# Altium PCB ATLAS_XP2V6.PcbDoc (part 4 of 4)
Units mil, origin at the board's own origin, x right, y up, seen from the top; angles counter-clockwise.
Board outline 6380 x 9190 mil, 4 copper layers (Primary Component Side, Ground Plane, Power Plane, Secondary Component Side), stack 35.4 mil thick; 203 components, 228 nets, 1212 pads, 912 vias.
Unrouted connection lines stored in the file: 522.
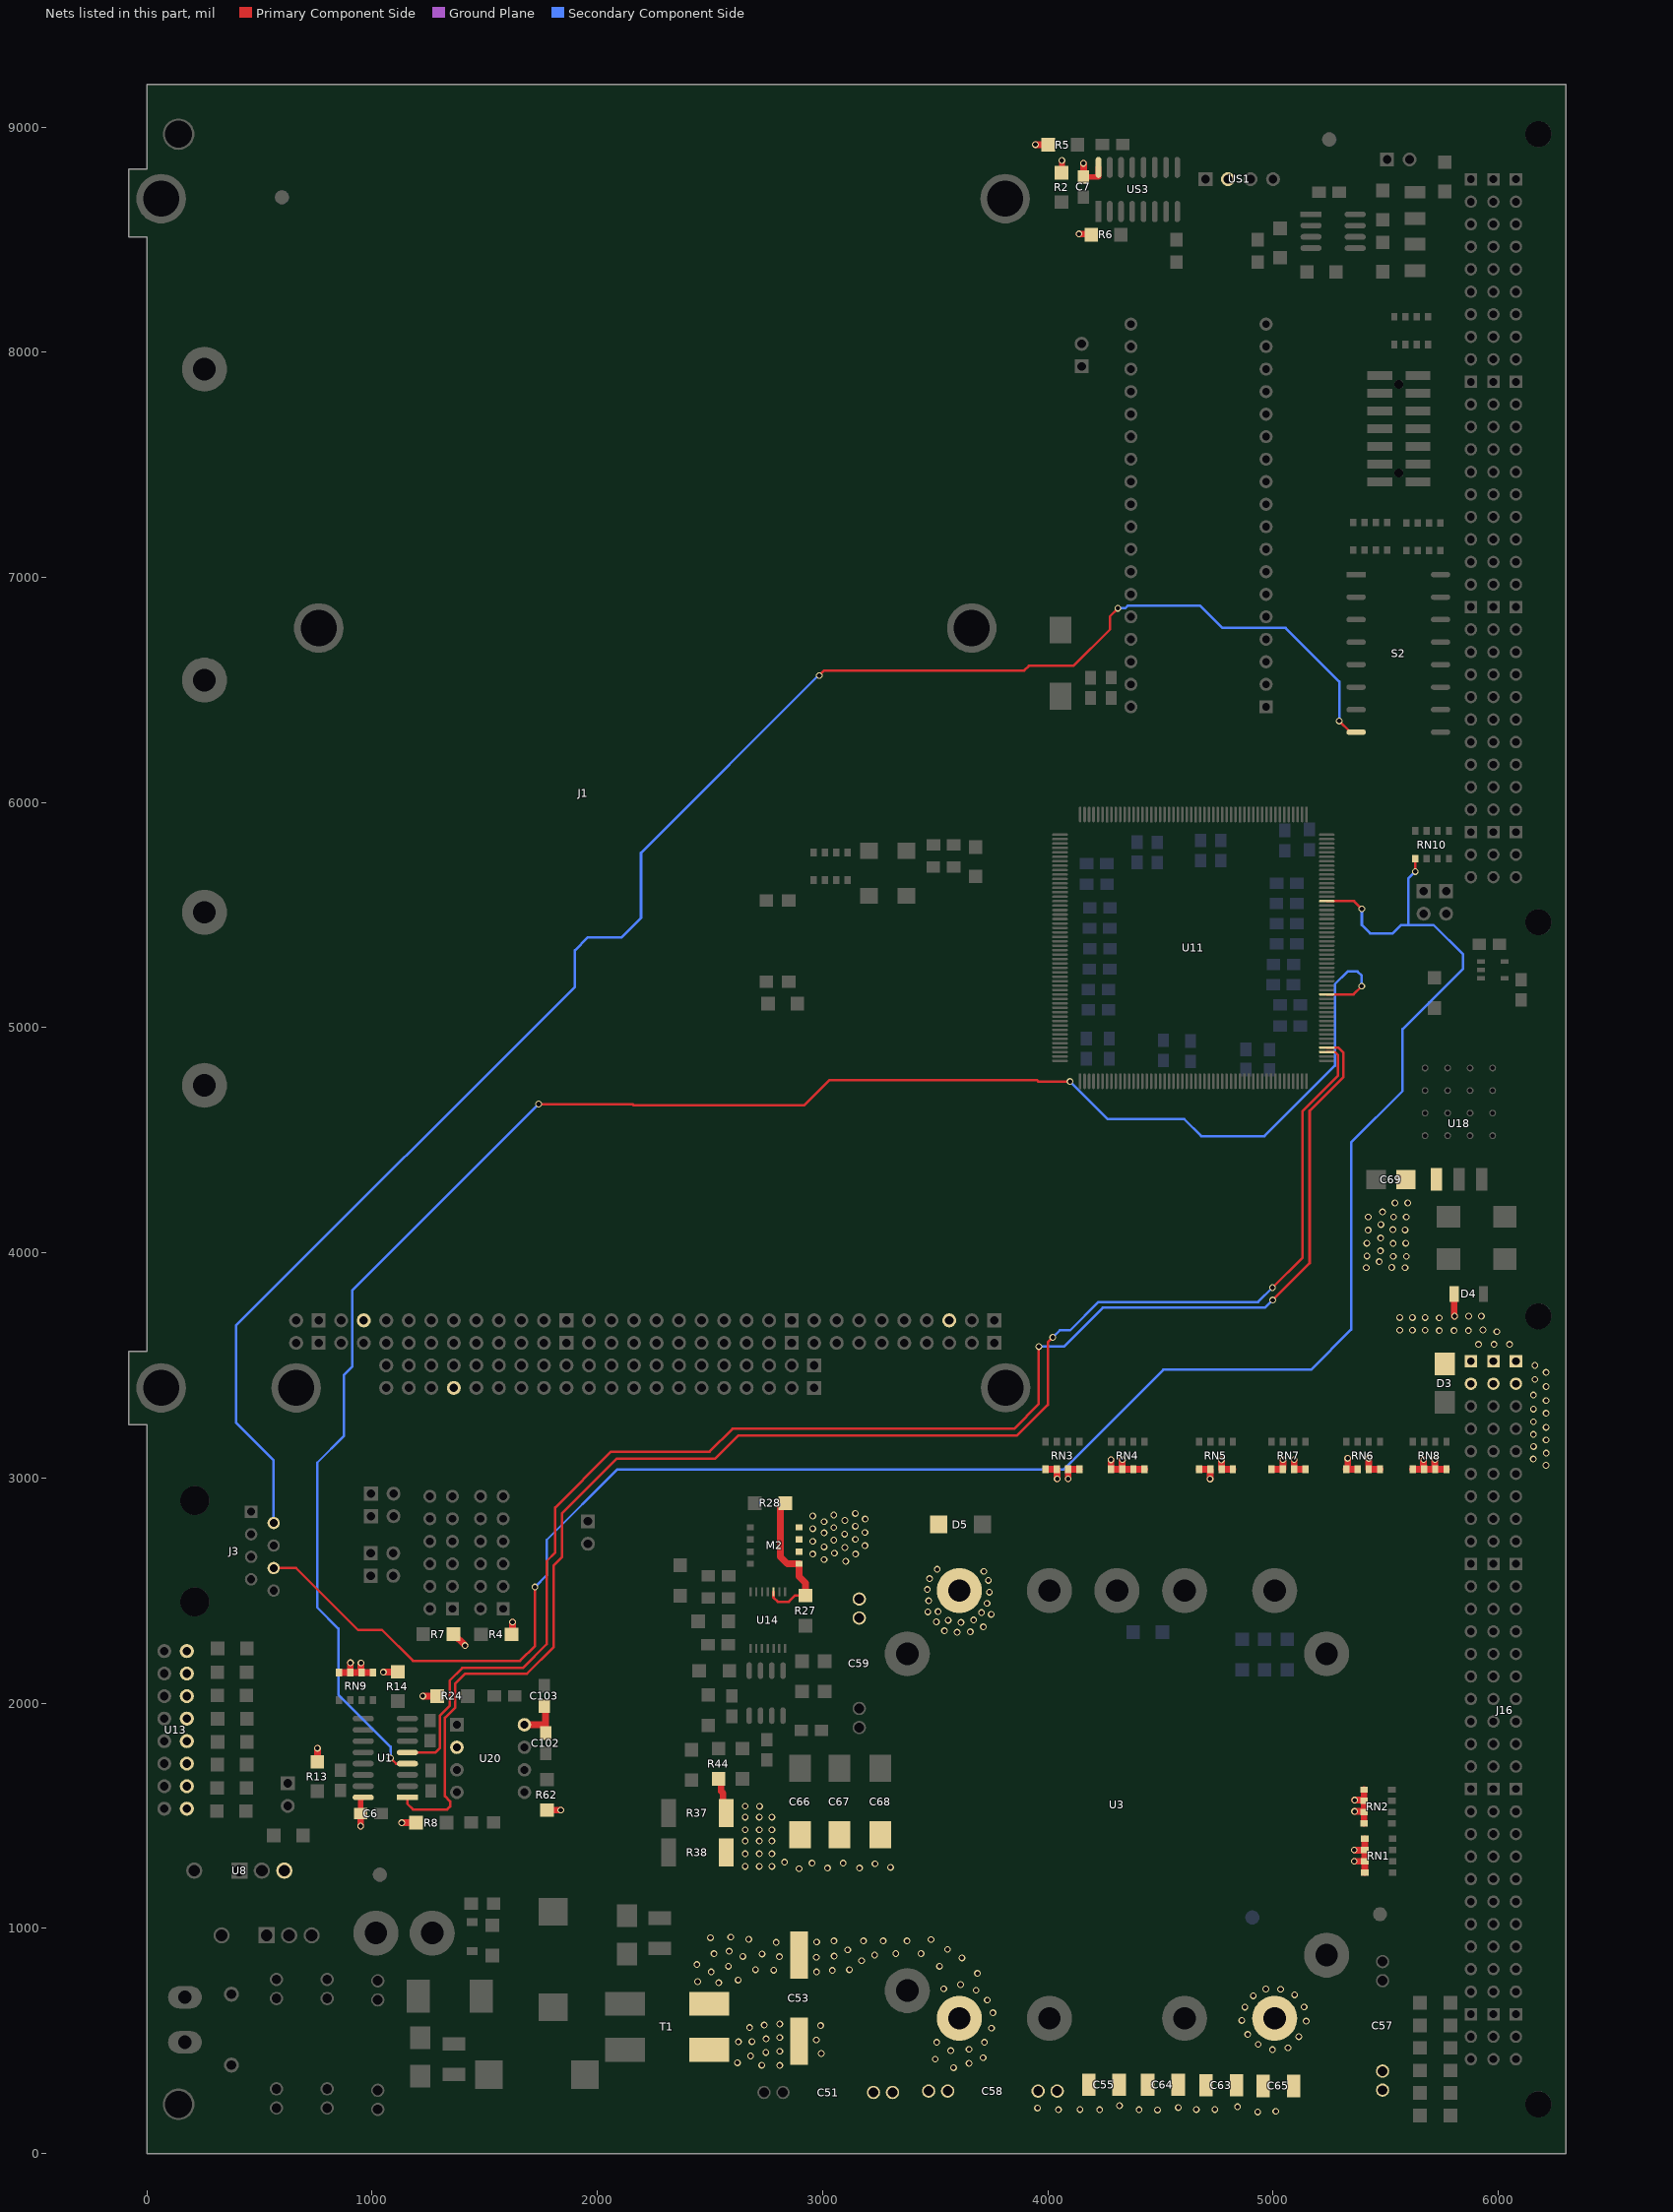
[diagram p6: the nets of this part, all layers, seen from the top]

## Via types
v1: diameter 30, hole 20, Primary Component Side to Secondary Component Side, 910 vias
v2: diameter 50, hole 28, Primary Component Side to Secondary Component Side, 2 vias

## Nets (pads, with @x,y where several pads share a name; then routed paths per layer and width w, separated by ;. In a path a pad name is that pad's centre, name@x,y a point inside that pad or via, vN(x,y) a via of type N, cw(c..) or ccw(c..) an arc to the next point about the centre after c; other vN are vias at no path point) (continued)
VCC_+5V: C6.1 C7.1 C69.1 C102.1 C103.1 D3.2 D4.2 J1.B3 J1.B29 J1.D16 J16.A1 J16.A2 J16.B1 J16.B2 J16.C1 J16.C2 M2.5 M2.6 M2.7 M2.8 R2.1 R4.1 R5.1 R6.1 R7.1 R8.1 R13.1 R14.1 R24.2 R27.1 R28.1 R62.2 RN1.1 RN1.2 RN1.3 RN1.4 RN2.1 RN2.2 RN2.3 RN2.4 RN3.1 RN3.2 RN3.3 RN3.4 RN4.1 RN4.2 RN4.3 RN4.4 RN5.1 RN5.2 RN5.3 RN5.4 RN6.1 RN6.2 RN6.3 RN6.4 RN7.1 RN7.2 RN7.3 RN7.4 RN8.1 RN8.2 RN8.3 RN8.4 RN9.1 RN9.2 RN9.3 RN9.4 U1.16 U8.3 U13.1 U13.2 U13.3 U13.4 U13.5 U13.6 U13.7 U13.8 U14.10 U18.1 U20.2 U20.8 US1.2 US3.16 | length 3908.6
  Primary Component Side w12: U1.16@949.17,1581.25 U1.16@951.99,1581.25 ; v1@950,2178.51 v1(950.08,2178.59) ; R4.1@1618.73,2304.98 R4.1@1623.16,2304.98 ; U14.10@2782.08,2494.27 2782.08,2468.75 2800.83,2450 2850,2450 2878.27,2478.27 R27.1@2924.02,2478.27 ; v1@4279.91,3080.71 v1(4280.53,3080.71) ; v1@4329.91,3081.25 v1(4331.25,3081.25)
  Primary Component Side w25: C6.1@949.17,1509 U1.16@949.17,1581.25 ; U1.16@951.99,1581.25 U1.16@960.25,1581.25 ; R2.1@4061.04,8796.73 4062.5,8796.73 v1(4062.46,8851.88) ; v1@4138.4,8525 v1(4138.4,8525.24) ; C7.1@4158.61,8779 4225,8779 US3.16@4225,8821 ; R6.1@4193.56,8521.91 R6.1@4193.56,8525
  Primary Component Side w29.53: v1@4279.91,3080.71 RN4.1@4279.91,3038.4 RN4.2@4329.91,3038.4 ; v1@4329.91,3081.25 RN4.2@4329.91,3038.4 ; RN4.3@4379.91,3038.4 RN4.2@4329.91,3038.4
  Primary Component Side w30: R13.1@756.68,1738.9 757,1738.9 v1(757,1800) ; RN9.4@853.08,2136.48 RN9.3@903.08,2136.48 ; v1(903.37,2179.18) 903.08,2178.89 RN9.3@903.08,2136.48 ; v1(949,1454) 949,1509 C6.1@949.17,1509 ; v1@950,2178.51 950,2136.56 RN9.2@949.92,2136.48 ; RN9.1@1003.08,2136.48 RN9.2@953.08,2136.48 RN9.2@949.92,2136.48 ; v1(1050,2137.5) 1113.71,2137.5 R14.1@1113.71,2139.48 ; v1(1131.25,1468.75) R8.1@1195,1468.75 ; v1(1225,2031.25) R24.2@1288.75,2031.25 ; R7.1@1361.25,2306.25 1361.8,2306.25 v1@1412.37,2255.68 ; R4.1@1623.16,2304.98 v1(1623.16,2360) ; U20.8@1675.98,1903.97 1768.47,1903.97 1768.99,1903.45 1768.99,1880.44 C102.1@1769.99,1879.44 ; C103.1@1764.13,1986.65 1769.99,1986.65 C102.1@1769.99,1879.44 ; C102.1@1769.99,1867.05 C102.1@1769.99,1879.44 ; R62.2@1775.84,1525.04 v1(1837.5,1525) ; R28.1@2834.15,2888.41 2813,2867.27 2813,2650 2843.91,2619.09 M2.5@2894.96,2619.09 ; R27.1@2924.02,2478.27 2924.02,2533.27 2894.96,2562.32 M2.5@2894.96,2619.09 ; v1(3945,8922) 4001.38,8922 R5.1@4001.38,8921.28 ; RN3.1@3990.2,3038.4 RN3.2@4040.2,3038.4 4041.73,3038.4 v1(4041.73,2996.28) ; v1(4090.02,2996.29) 4090.2,2996.29 RN3.3@4090.2,3038.4 RN3.4@4140.2,3038.4 ; v1@4138.4,8525 R6.1@4193.56,8525 ; v1(4158,8839) 4158.61,8839 C7.1@4158.61,8779 ; RN4.3@4379.91,3038.4 RN4.4@4429.91,3038.4 ; RN5.1@4671.5,3038.4 RN5.2@4720.4,3038.4 ; v1(4720.4,2995.41) RN5.2@4720.4,3038.4 ; v1(4770.86,3080.43) 4770.86,3081.25 4771.5,3081.25 RN5.3@4771.5,3038.4 RN5.4@4821.5,3038.4 ; RN7.1@4993.76,3038.4 RN7.2@5043.76,3038.4 v1(5043.75,3081.25) ; v1(5093.75,3081.25) RN7.3@5093.76,3038.4 RN7.4@5143.76,3038.4 ; RN6.1@5325.05,3038.4 RN6.1@5332.15,3038.4 ; v1(5331.25,3087.5) 5332.15,3087.5 RN6.1@5332.15,3038.4 ; v1(5360.44,1347.95) 5362.5,1347.95 5362.5,1347.41 RN1.2@5407.79,1347.4 ; v1(5360.65,1297.48) 5362.5,1297.48 5362.5,1297.41 RN1.3@5407.79,1297.4 ; v1(5362.18,1518.67) 5361.54,1519.31 RN2.3@5404.38,1519.31 ; v1(5362.34,1569.14) 5362.2,1569.28 RN2.2@5404.38,1569.28 ; RN6.2@5375.05,3038.4 RN6.1@5332.15,3038.4 ; RN2.4@5404.38,1465.82 RN2.3@5404.38,1515.82 RN2.3@5404.38,1519.31 ; RN2.1@5404.38,1615.82 RN2.2@5404.38,1569.28 ; RN1.4@5407.79,1247.4 RN1.3@5407.79,1297.4 ; RN1.1@5407.79,1397.4 RN1.2@5407.79,1347.4 ; v1(5425,3087.5) 5425.05,3087.5 RN6.3@5425.05,3038.4 RN6.4@5475.05,3038.4 ; RN8.1@5620.15,3038.4 RN8.2@5668.16,3038.4 ; v1(5668.75,3081.25) 5668.16,3081.25 RN8.2@5668.16,3038.4 ; v1(5718.75,3081.25) 5718.39,3081.25 RN8.3@5718.39,3038.4 ; RN8.4@5770.15,3038.4 RN8.3@5720.15,3038.4 RN8.3@5718.39,3038.4 ; D4.2@5804,3818 5804,3718.75 v1(5806.25,3718.75) ; RN9.3@903.08,2136.48 RN9.2@949.92,2136.48 ; v1@1412.37,2255.68 1412.5,2255.68 1412.5,2255.55 v1@1412.37,2255.68 ; M2.5@2894.96,2619.09 M2.5@2895.87,2619.09 2894.96,2620 M2.5@2894.96,2619.09 ; RN5.2@4720.4,3038.4 4720.4,3039.5 RN5.2@4721.5,3038.4 RN5.2@4720.4,3038.4 ; RN2.3@5404.38,1519.31 RN2.2@5404.38,1565.82 RN2.2@5404.38,1569.28 ; RN1.3@5407.79,1297.4 RN1.2@5407.79,1347.4 ; RN8.2@5668.16,3038.4 RN8.2@5670.15,3038.4 RN8.3@5718.39,3038.4
  Ground Plane w50: J16.C1@5878.25,3518.75 J16.C1@5878.5,3518.5
  other v1: 1412.33,2255.68 3102.68,2630.07 3006.25,2637.5 2956.25,2662.5 3146.68,2662.14 3052.71,2665.87 3098.95,2691.23 3006.25,2693.75 3187.7,2699.43 2956.25,2718.75 3049.72,2724.04 3145.19,2727.03 3097.45,2750.89 3006.25,2756.25 3187.7,2757.61 2956.25,2775 3049.72,2779.98 3145.19,2785.95 3006.25,2806.25 3098.95,2811.31 3189.19,2817.27 2956.25,2831.25 3049.34,2835.39 3145.19,2842.63 6211.93,3056.44 6155.45,3084.53 6212.82,3110.56 6156.93,3140.13 6212.5,3168.75 6156.25,3193.75 6212.5,3225 6156.25,3250 6212.5,3287.5 6156.25,3306.25 6212.5,3343.75 6156.25,3368.75 6212.5,3406.25 6162.5,3437.5 6212.5,3468.75 6162.5,3500 5912.5,3593.75 5981.25,3593.75 6050,3593.75 5993.75,3650 5738.19,3654.73 5803.42,3654.73 5867.68,3654.73 5562.5,3656.25 5618.75,3656.25 5675,3656.25 5932.03,3657.36 5738.19,3710.84 5562.5,3712.5 5618.75,3712.5 5675,3712.5 5868.75,3718.75 5925,3718.75 5414,3934 5527,3935 5586,3934 5471,3961 5533.52,3984.19 5591.86,3984.19 5417.32,3985.63 5477,4009 5533.04,4041.56 5589.45,4042.53 5416.79,4043.01 5478,4066 5422,4101 5532,4103 5586,4102 5479,4126 5422.75,4159 5535.25,4159 5591.5,4159 5486,4182 5541.5,4221.5 5597.75,4221.5
VCCVICOR: C59.3 C59.4 C66.1 C67.1 C68.1 D5.1 R37.2 R38.2 R44.2 U3.5 | length 179.6
  Primary Component Side w29.53: R44.2@2537.5,1663.75 2548.83,1663.75 2548.83,1608.99 2558.06,1599.76 2558.06,1512.5 R37.2@2571.25,1512.5
  other v1: 2895.52,1264.94 3021.99,1267.28 3163.67,1267.28 3301.84,1270.79 2656.25,1275 2718.75,1275 2775,1275 3232.86,1286.61 2952.83,1289.5 3091.4,1289.5 2831.25,1293.75 2656.25,1331.25 2718.75,1331.25 2775,1331.25 2656.25,1387.5 2718.75,1387.5 2775,1387.5 2656.25,1437.5 2718.75,1437.5 2775,1437.5 2656.25,1493.75 2718.75,1493.75 2775,1493.75 2720.4,1541.91 2656.08,1542.33 3597.12,2314.64 3656.04,2316.88 3541.18,2321.36 3713.47,2338.51 3614.27,2358.65 3505.12,2361.09 3557.59,2368.34 3670.21,2369.09 3748.76,2394.19 3705.55,2402.46 3467.42,2405.22 3512.5,2406.25 3730.37,2442.92 3471.07,2454.86 3740.49,2492.57 3465.11,2504.83 3735.89,2544.97 3474.8,2553.31 3715.66,2585.43 3508.8,2594.62
VICOR_+IN: C51.1 C51.2 C53.1 C55.1 C58.1 C58.2 C63.1 C64.1 C65.1 T1.2 U3.1
  other v1: 3581.25,381.25 3650,400 3500,418.75 3712.5,425 3568.75,456.25 3650,462.5 3506.25,493.75 3718.75,493.75 3750,556.25 3756.25,625 3731.25,681.25 3681.25,725 3537.5,731.25 3612.5,750 2539,758 2445,763 2625,770 3687.5,800 2505,806 2973,806 3043,813 2783,814 2702,816 3119,816 2582,831 3518.75,831.25 2442,839 3173,856 3618.75,868.75 2972,871 2646,875 2808,874 3051,876 3231,881 2518,887 2731,886 3325,887.5 3437.5,887.5 2585,898 3111.31,904.17 3554.69,906.03 2793.75,937.5 2974,939 3050,943.75 3181.25,943.75 3268.75,943.75 3375,943.75 2672,951 3481.25,950 2502,958 2592,960.75
VICOR_-IN: C53.2 C55.2 C57.1 C57.2 C58.3 C58.4 C63.2 C64.2 C65.2 T1.3 U3.4
  other v1: 4932,184 5012,187 4487,193 4047,194 4143,195 4230,194 4405,194 4659,195 4742,195 3954,202 4579,204 4842,207 4318,212 2810,391 2730,392 2622,403 2680,433 2994,444 2748,449 2810,454 4997.31,461.02 5066.4,469.22 4934.08,484.44 2626,496 2686,497 2972,504 2749,509 2810,515 5114.41,518.4 4887.24,528.93 2676,559 2991,568 2741,570 2810,575 5147.19,587.48 4861.48,590.99 4875,650 5137.83,650.71 4912.5,700 5095.67,704.58 5033.61,729.17 4968.04,730.34
WDT_OUT_STARI: U1.5 U11.56 | length 6619
  Primary Component Side w11: U1.5@1156.25,1781.25 1281.25,1781.25 1300,1800 1300,1943.75 1343.75,1987.5 1343.75,2100 1400,2156.25 1668.75,2156.25 1775,2262.5 1775,2631.25 1812.5,2668.75 1812.5,2868.75 2060.75,3117 2498.25,3117 2600,3218.75 3850,3218.75 3960.04,3328.79 v1(3960.04,3583.86) ; v1(4998.49,3790.23) 5162.5,3954.24 5162.5,4631.25 5312.5,4781.25 5312.5,4887.5 5288.4,4911.6 U11.56@5238.45,4911.6
  Secondary Component Side w11: v1(3960.04,3583.86) 3960.04,3583.45 4070.95,3583.45 4243.75,3756.25 4964.51,3756.25 v1(4998.49,3790.23)
WDT_SIG_STARI: U1.4 U11.68 | length 8078.9
  Primary Component Side w11: v1(1081.25,1756.25) 1106.25,1731.25 U1.4@1156.25,1731.25 ; v1(1739,4661) 1739,4659.47 2157,4659.47 2160.22,4656.25 2918.75,4656.25 3030.5,4768 3950.75,4768 3957.47,4761.28 v1(4098.51,4761.28) ; U11.68@5238.45,5148 5357.54,5148 5393.92,5184.38 v1(5393.74,5184.55)
  Secondary Component Side w11: v1(1081.25,1756.25) 1081.25,1806.25 850,2037.5 850,2331.25 756.25,2425 756.25,3068.33 875.42,3187.5 875.42,3458.42 912,3495 912,3834 v1(1739,4661) ; v1(4098.51,4761.28) 4266.04,4593.75 4606.25,4593.75 4681.25,4518.75 4962.25,4518.75 5274.75,4831.25 5274.75,5151.05 5275.25,5151.55 5275.25,5193.75 5331.25,5249.75 5375.25,5249.75 5393.74,5231.26 v1(5393.74,5184.55)
WDT_TRG: U1.1 U11.55 | length 6862.4
  Primary Component Side w10.9: U1.1@1156.25,1581.25 1156.25,1552.75 1181,1528 1333,1528 1346,1541 1346,1563.42 1323,1586.42 1323,1935.5 1368.75,1981.25 1368.75,2087.5 1412.5,2131.25 1687.5,2131.25 1806.25,2250 1806.25,2612.5 1843.75,2650 1843.75,2843.75 2085,3085 2522.5,3085 2625,3187.5 3862.5,3187.5 4000,3325 4000,3602.47 v1(4022.1,3624.56) ; v1(4997.45,3845.6) 5131.25,3979.4 5131.25,4629.88 5287.5,4786.13 5287.5,4879.52 5275.12,4891.9 U11.55@5238.45,4891.9
  Secondary Component Side w10.9: v1(4022.1,3624.56) 4053.78,3656.25 4100,3656.25 4225,3781.25 4933.1,3781.25 v1(4997.45,3845.6)
XP_PRESENT_IN: J3.6 RN10.5 U11.89 | length 8766.1
  Primary Component Side w11: J3.6@562.5,2600 662.5,2600 937.5,2325 1043.75,2325 1181.25,2187.5 1656.25,2187.5 1722.87,2254.12 v1(1722.87,2516.01) ; U11.89@5238.45,5561.7 5360,5561.7 v1(5394.23,5527.46) ; RN10.5@5631.05,5751.1 5631.25,5751 v1(5631.25,5693.25)
  Secondary Component Side w11: v1(1722.87,2516.01) 1775,2568.15 1775,2725 2087.5,3037.5 4068.75,3037.5 4512.5,3481.25 5168.75,3481.25 5347,3659.5 5347,4490.75 5575,4718.75 5575,4993.75 5843.75,5262.5 5843.75,5325 5712.5,5456.25 5600,5456.25 ; v1(5394.23,5527.46) 5394.23,5455.77 5431.25,5418.75 5531.25,5418.75 5568.75,5456.25 5600,5456.25 ; v1(5631.25,5693.25) 5600,5662.5 5600,5456.25
XP_PRESENT_OUT: J3.2 S2.8 | length 7878.5
  Primary Component Side w11: v1(2985,6564) 3007,6586 3895,6586 3916,6607 4114,6607 4276,6769 4276,6827.26 v1(4311.29,6862.55) ; v1(5293.75,6362.5) 5343.75,6312.5 S2.8@5368.75,6312.5
  Primary Component Side w12: v1@4311.29,6862.5 v1(4311.29,6862.55)
  Secondary Component Side w11: J3.2@562.5,2800 562.5,3079 395,3246.5 395,3676.25 1900,5181.25 1900,5343.75 1956.25,5400 2106.25,5400 2193.75,5487.5 2193.75,5776.5 2981.25,6564 v1(2985,6564) ; v1(4311.29,6862.55) 4343.75,6862.55 4356.2,6875 4675,6875 4775,6775 5056.17,6775 5293.75,6537.42 v1(5293.75,6362.5)
pads on no net: J1.A1 J1.A10 J1.B5 J1.B6 J1.B7 J1.B8 J1.B9 J1.B15 J1.B16 J1.B17 J1.B18 J1.B19 J1.B20 J1.B21 J1.B22 J1.B23 J1.B24 J1.B25 J1.B26 J1.B27 J1.B30 J1.C6 J1.C7 J1.C8 J1.C9 J1.C10 J1.D1 J1.D8 J1.D9 J1.D10 J1.D11 J1.D12 J1.D13 J1.D14 J1.D15 J1.D17 J3.MTH1 J3.MTH2 J14.12 J14.14 J14.15 J14.16 J16.A16 J16.A17 J16.A18 J16.A19 J16.A21 J16.A23 J16.A27 J16.A29 J16.HOLE1 J16.HOLE2 J17.A4 J17.A5 J17.A6 J17.A7 J17.A8 J17.A9 J17.A10 J17.A11 J17.A12 J17.A13 J17.A14 J17.A15 J17.A16 J17.A17 J17.A18 J17.A19 J17.A20 J17.A21 J17.A22 J17.A23 J17.A24 J17.A25 J17.A26 J17.A27 J17.A28 J17.A29 J17.A30 J17.A31 J17.A32 J17.B4 J17.B5 J17.B6 J17.B7 J17.B8 J17.B9 J17.B10 J17.B11 J17.B12 J17.B13 J17.B14 J17.B15 J17.B16 J17.B17 J17.B18 J17.B19 J17.B20 J17.B21 J17.B22 J17.B23 J17.B24 J17.B25 J17.B26 J17.B27 J17.B28 J17.B29 J17.B30 J17.B31 J17.B32 J17.C4 J17.C5 J17.C6 J17.C7 J17.C8 J17.C9 J17.C10 J17.C11 J17.C12 J17.C13 J17.C14 J17.C15 J17.C16 J17.C17 J17.C18 J17.C19 J17.C20 J17.C21 J17.C22 J17.C23 J17.C24 J17.C25 J17.C26 J17.C27 J17.C28 J17.C29 J17.C30 J17.C31 J17.C32 J17.HOLE1 J17.HOLE2 RN1.5 RN9.8 RN10.6 RN13.8 RN14.8 S2.7 U1.12 U3.2 U3.3 U8.2 U9.2 U11.1 U11.2 U11.24 U11.27 U11.51 U11.52 U11.53 U11.54 U11.103 U11.104 U11.105 U11.106 U11.135 U11.146 U11.155 U11.156 U11.157 U11.158 U11.167 U11.171 U11.172 U11.175 U11.207 U11.208 U14.3 U15.1 U15.34 U20.5 UR5.1 UR6.1 UR7.1 UR8.1 UR9.1 UR10.1 UR11.1 UR12.1 US3.4 US3.5 US3.6 US3.7 US3.9 US3.10 US3.11 US3.12
copper on no net: | length 999.4
  Ground Plane w2: 410.51,393 ccw(c375,393) 410.51,393 ; 5361.56,2219 ccw(c5238,2219) 5361.56,2219

## Polygon pours and split planes (outlines as drawn)
$$$25132 on Primary Component Side (solid, remove dead copper, pour order 84): 2550,2225 2687.5,2225 2687.5,2268.75 2631.25,2325 2631.25,2393.75 2550,2393.75
GND_PE11 on Primary Component Side (solid, remove dead copper, pour order 82): 3087.5,1875 3118.75,1843.75 3200,1843.75 3250,1893.75 3250,1956.25 3400,2106.25 3418.75,2106.25 3481.25,2168.75 3481.25,2262.5 3418.75,2325 3337.5,2325 3206.25,2193.75 3206.25,2093.75 3087.5,1975
VICOR_-IN on Primary Component Side (solid, remove dead copper, pour order 80): 34 vertices, not listed, extent 3894,154.5 5133,373.25
+24VDC_DIODE on Primary Component Side (solid, remove dead copper, pour order 78): 19 vertices, not listed, extent 1312.5,456.25 1868,768.75
GND on Primary Component Side (solid, remove dead copper, pour order 76): 3175,5625 3175,5566 3162.5,5553.5 3162.5,5500 3187.5,5475 3262.5,5475 3281.25,5493.75 3281.25,5625
GND on Primary Component Side (solid, remove dead copper, pour order 68): 4833.68,2500 ccw(c5007,2500) 5007,2326.68 ccw(c5007,2500) 5180.32,2500 ccw(c5007,2500) 5007,2673.32 ccw(c5007,2500)
+24VDC on Primary Component Side (solid, remove dead copper, pour order 64): 23 vertices, not listed, extent 6.25,162.5 1131.25,1119
GND on Primary Component Side (solid, remove dead copper, pour order 56): 5757,700 5793.75,700 5817.38,676.38 5817.38,573 5834,556.25 6106.25,556.25 6125,537.5 6125,343.75 5881.25,100 5795,100 5757,138
GND on Primary Component Side (solid, remove dead copper, pour order 54): 19 vertices, not listed, extent 5636,3869 5885,4393.62
VCCVICOR on Primary Component Side (solid, remove dead copper, pour order 52): 31 vertices, not listed, extent 2537.5,1225 3825,2837.5
VICOR_-IN on Primary Component Side (solid, remove dead copper, pour order 48): 2401,507 2410,516 2586,516 2674,604 3000,604 3026,578 3026,430.51 2955.61,361 2448,361 2401,408
GND on Primary Component Side (solid, remove dead copper, pour order 44): 3957,6859 3990,6892 4147,6892 4171.5,6867.5 4171.5,6716 4156.25,6700.75 3993,6700.75 3960.38,6733.38 3960.38,6859
VCC_3V3 on Primary Component Side (solid, remove dead copper, pour order 42): 19 vertices, not listed, extent 5900,3778.5 6220,4383.5
VCC_3V3 on Primary Component Side (solid, remove dead copper, pour order 40): 3343.75,5874 3363.75,5894 3492.5,5894 3512.5,5874 3512.5,5641 3492.5,5621 3467,5621 3453,5635 3452.88,5637 3452.88,5722.88 3432,5743.75 3363.75,5743.75 3343.75,5763.75
VICOR_+IN on Primary Component Side (solid, remove dead copper, pour order 38): 64 vertices, not listed, extent 2407,151.5 4985,993.75
GND_24V_CMCHK on Primary Component Side (solid, remove dead copper, pour order 36): 1875,406.25 1893.75,425 1982,513 2193,513 2210.5,495.5 2210.5,380 2210.25,377.75 2193.75,361.25 2193.75,162.5 2182.25,151 1911.5,151 1875,187.5
VCC_+5V on Primary Component Side (solid, remove dead copper, pour order 34): 17 vertices, not listed, extent 5531.25,3031.25 6243.75,3762.5
VCC_5V_TPS_IN on Primary Component Side (solid, remove dead copper, pour order 32): 22 vertices, not listed, extent 1975,1275 2693.75,2862.5
VCC_+5V on Primary Component Side (solid, remove dead copper, pour order 22): 2776.25,2843.75 2756.25,2823.75 2756.25,2626.25 2776.25,2606.25 3162.5,2606.25 3287.5,2731.25 3287.5,2843.75 3256.25,2875 2943,2875 2931.25,2863.25 2931.25,2853.75 2921.25,2843.75
GND on Primary Component Side (solid, remove dead copper, pour order 20): 21 vertices, not listed, extent -64.12,8511 379.88,9162.94
GND on Primary Component Side (solid, remove dead copper, pour order 18): 2612.5,1673.75 2632.5,1693.75 2681.25,1693.75 2743.75,1756.25 2806.25,1756.25 2875,1825 3325,1825 3368.75,1781.25 3368.75,1700 3318.75,1650 2850,1650 2825,1625 2632.5,1625 2612.5,1645
GND_PE on Primary Component Side (solid, remove dead copper, pour order 10): 93 vertices, not listed, extent 12.5,12.5 5683,2337.5
+24VDC_CMCHK on Primary Component Side (solid, remove dead copper, pour order 8): 20 vertices, not listed, extent 1762.5,610 2326,1125
VCC_+5V on Primary Component Side (solid, remove dead copper, pour order 6): 21 vertices, not listed, extent 5383,3902.5 5750,4387.5
GND on Primary Component Side (solid, remove dead copper, pour order 4): 5381,4239 5396.5,4223.5 5472,4223.5 5503,4254.5 5503,4391.5 5517,4405.5 5517,4495.5 5496,4516.5 5420,4516.5 5381,4477.5
GND_24VDC on Primary Component Side (solid, remove dead copper, pour order 2): 1137.5,181.25 1156.25,162.5 1556.25,162.5 1575,181.25 1575,412.5 1425,412.5 1406.25,393.75 1162.5,393.75 1137.5,368.75
+24VDC_SW on Primary Component Side (solid, remove dead copper, pour order 0): 20 vertices, not listed, extent 1156.25,462.5 1467,1118
VICOR_+IN on Ground Plane (solid, remove dead copper, pour order 46): 30 vertices, not listed, extent 2407,147.69 3814,993.75
+24VDC_DIODE on Ground Plane (solid, remove dead copper, pour order 30): 19 vertices, not listed, extent 1312.5,456.25 1870,768.75
+24VDC on Ground Plane (solid, remove dead copper, pour order 28): 23 vertices, not listed, extent 6.25,162.5 1131.25,1118
+24VDC_CMCHK on Ground Plane (solid, remove dead copper, pour order 26): 17 vertices, not listed, extent 1868.75,662.5 2193.75,1125
+24VDC_SW on Ground Plane (solid, remove dead copper, pour order 14): 1156.25,1092.25 1156.25,576.25 1176.25,556.25 1236.25,556.25 1256.25,576.25 1256.25,770.25 1367.25,881.25 1412.5,881.25 1418.75,887.5 1418.75,956.25 1393.75,981.25 1393.75,1075 1350.75,1118 1182,1118
GND on Ground Plane (solid, remove dead copper, pour order 12): 59 vertices, not listed, extent -62.5,362.5 6281.25,9162.5
VCCVICOR on Secondary Component Side (solid, remove dead copper, pour order 74): 3431.25,2598.75 3451.25,2618.75 3786.25,2618.75 3806.25,2598.75 3806.25,2270 3786.25,2250 3550,2250 3431.25,2368.75
GND_24V_CMCHK on Secondary Component Side (solid, remove dead copper, pour order 72): 31 vertices, not listed, extent 1875,152.5 2327,1125
VICOR_-IN on Secondary Component Side (solid, remove dead copper, pour order 70): 32 vertices, not listed, extent 2403,151.12 5546,993.75
GND on Secondary Component Side (solid, remove dead copper, pour order 66): 55 vertices, not listed, extent 4812.5,2257.75 5176.77,2675.11
GND on Secondary Component Side (solid, remove dead copper, pour order 62): 48 vertices, not listed, extent 2387.5,325 6131.25,2618.75
GND on Secondary Component Side (solid, remove dead copper, pour order 60): 21 vertices, not listed, extent -63.12,8512 380.88,9163.94
GND_PE on Secondary Component Side (solid, remove dead copper, pour order 58): 56 vertices, not listed, extent 4813,1988.5 5339.55,2322.01
GND_24VDC on Secondary Component Side (solid, remove dead copper, pour order 50): 39 vertices, not listed, extent 6.25,162.5 1867,1137.5
GND_PE on Secondary Component Side (solid, remove dead copper, pour order 24): 29 vertices, not listed, extent 12,15.09 5342.83,341
VCC_+5V on Secondary Component Side (solid, remove dead copper, pour order 16): 89 vertices, not listed, extent 2931.25,2606.25 6256.25,3762.5
VCC_3V3 on Power Plane (split plane): 46 vertices, not listed, extent 2869.83,3886.08 6230.17,8248.92
VCC_5V_TPS_IN on Power Plane (split plane): 35 vertices, not listed, extent 1969.83,1276.08 2949.92,2867.67
VICOR_-IN on Power Plane (split plane): 47 vertices, not listed, extent 2403.08,151.07 5546.92,992.67
VCCVICOR on Power Plane (split plane): 31 vertices, not listed, extent 2538.58,1226.08 3823.92,2617.67
VCC_+5V on Power Plane (split plane): 218 vertices, not listed, extent 32.33,1057.33 6248.92,9148.92
GND_24VDC on Power Plane (split plane): 45 vertices, not listed, extent 337.69,670.69 412.31,744.3
no net on Power Plane (split plane): 53 vertices, not listed, extent 1876.08,152.58 2209.66,1123.92
GND_24VDC on Power Plane (split plane): 63 vertices, not listed, extent 7.33,163.58 1865.92,1136.42

## Keep-outs
Keep-Out Layer:
  the board outline again, w10

## Other copper
Primary Component Side:
  region net GND: 3656.25,2856.25 3656.25,2737.5 3693.75,2700 3787.5,2700 3818.75,2731.25 3818.75,2850 3800,2868.75 3668.75,2868.75 3656.25,2856.25
  region net GND: 2775,2225 2775,2350 2793.75,2368.75 2856.25,2368.75 2868.75,2356.25 2868.75,2281.25 2843.75,2256.25 2843.75,2225 2775,2225
  text "ATLAS_XP2" at 900,8837.5 h110
  text "v1.2" at 1981.25,8831.25 h42.5
Ground Plane:
  pour cut-out: 4800,8800 4818.75,8800 4831.25,8812.5 4831.25,8725 4818.75,8737.5 4800,8737.5 4800,8800
  pour cut-out: 2712.5,1781.25 2712.5,1643.75 2731.25,1625 2806.25,1625 2837.5,1656.25 3331.25,1656.25 3375,1700 3375,1775 3318.75,1831.25 2762.5,1831.25 2712.5,1781.25
  pour cut-out: 2835,2018.75 2825,2008.75 2825,1897.5 2835,1887.5 3015,1887.5 3025,1897.5 3025,2008.75 3015,2018.75 2835,2018.75
  pour cut-out: 2736.25,2581.25 2728,2573 2728,2502 2736.25,2493.75 2827.5,2493.75 2837.5,2503.75 2837.5,2571.25 2827.5,2581.25 2736.25,2581.25
  pour cut-out: 4500,2618.75 4475,2593.75 4475,2407.5 4501.25,2381.25 4712.5,2381.25 4731.25,2400 4731.25,2586.25 4698.75,2618.75 4500,2618.75
  pour cut-out: 548,257 600,257 600,235 548,235 548,257
  pour cut-out: 970,793 994,793 994,754 970,754 970,793
  pour cut-out: 2410,2281.25 2400,2271.25 2400,2185 2410,2175 2477.5,2175 2487.5,2185 2487.5,2271.25 2477.5,2281.25 2410,2281.25
  pour cut-out: 1001,735 1049,735 1049,716 1001,716 1001,735
  pour cut-out: 2772.5,2381.25 2762.5,2371.25 2762.5,2272.5 2772.5,2262.5 2877.5,2262.5 2887.5,2272.5 2887.5,2371.25 2877.5,2381.25 2772.5,2381.25
  pour cut-out: 607,175 621,161 533,161 533,167.5 537,167.5 547,177.5 604,177.5 607,174.5 607,175
Secondary Component Side:
  text "v1.2" at 787.5,8831.25 h42.5
  text "ATLAS_XP2" at 1875,8831.25 h110
Power Plane (plane layer: these items are gaps in the copper):
  circle w2: c375,708 r38.33
  region: 13 vertices and 7 holes, not listed, extent -80,0 6300,9190
  pour cut-out: 1164,1065 1182.5,1046.5 1212.5,1076.5 1194,1095 1164,1065
  pour cut-out: 1670,572 1670,564 1668,562 1711,562 1709,564 1709,572 1670,572
  pour cut-out: 362,759 395,759 395,740 362,745 362,759
  pour cut-out: 3253,240 3283,240 3283,302 3253,302 3253,240
  pour cut-out: 558,738 596,738 596,723 558,723 558,738
  pour cut-out: 1341,907 1340,896 1359,896 1385.5,929.5 1370,945 1337,912 1340.5,908.5 1340.5,907 1341,907
  pour cut-out: 916.5,1053.5 927.5,1042.5 959,1074 948,1085 916.5,1053.5
  pour cut-out: 1063.5,1078.5 1083.5,1098.5 1121.5,1060.5 1101.5,1040.5 1063.5,1078.5
  pour cut-out: 3503,296 3522,296 3522,259 3503,259 3503,296
  pour cut-out: 1349,1086 1330,1067 1364.5,1032.5 1383.5,1051.5 1349,1086
  pour cut-out: 5750,3337.5 5750,3325 5756.25,3318.75 5850,3318.75 5856.25,3312.5 5862.5,3312.5 5862.5,3337.5 5750,3337.5
  pour cut-out: 779,740 821,740 821,721 779,721 779,740
  lines w2: 6.25,425 6.25,781.25 37.5,812.5 525,812.5 543.75,831.25 862.5,831.25 893.75,862.5 893.75,1094.75 920,1121 1377.25,1121 1393.75,1137.5 1587.5,1137.5 1612.5,1112.5 1612.5,981.25 1606.25,975 1606.25,724.75 1620,711 1845,711 1867,689 1867,583 1846.5,562.5 1543.75,562.5 1531.25,550 1531.25,487.5 1575,443.75 1575,181.25 1556.25,162.5 1156.25,162.5 1137.5,181.25 1137.5,331.25 1100,368.75 768.75,368.75 693.75,293.75 693.75,193.75 662.5,162.5 537.5,162.5 306.25,393.75 37.5,393.75 6.25,425 ; 31.25,1231.25 31.25,2968.75 148.75,3086.25 148.75,3629 106.88,3670.88 107.77,6276 107.77,7956.77 200,8049 200,8050 1300,9150 4811.25,9150 4831.25,9130 4831.25,8681.25 4737.5,8587.5 4625,8587.5 2818.75,6781.25 2818.75,4131.25 3068.75,3881.25 5137.5,3881.25 5312.5,4056.25 5312.5,4468.75 5360.75,4517 5538,4517 5622,4433 5622,3922 5751.56,3792.44 6008,3792 6068.75,3731.25 6068.75,3687.5 6250,3506.25 6250,1107.5 6198.75,1056.25 5443.75,1056.25 5318.75,1181.25 5318.75,1862.5 5406.25,1950 5406.25,2433.75 4996.25,2843.75 4787.5,2843.75 4687.5,2943.75 4687.5,3044.5 4761.75,3118.75 5281.25,3118.75 5312.5,3150 5518.75,3150 5693.75,3325 5868.75,3325 ccw(c5871.86,3350) 5868.75,3375 5722.69,3375 5718.75,3371.06 5718.75,3369.69 5700,3369.69 5562.5,3231.25 5218.75,3231.25 5181.25,3193.75 4700,3193.75 4637.5,3131.25 4637.5,2843.75 4456.25,2662.5 3931.25,2662.5 3868.75,2725 3271.31,2725 3168.75,2606.25 2951.25,2606.25 2931.25,2626.25 2931.25,2956.25 2975,3000 3901.56,3000 3970.31,2931.25 4325,2931.25 4375,2981.25 4375,3293.75 4537.5,3456.25 5181.25,3456.25 5262.5,3537.5 5859.55,3537.5 ccw(c5859.55,3565.62) 5859.55,3593.75 5275,3593.75 5168.75,3487.5 4512.5,3487.5 4356.25,3331.25 4356.25,3006.25 4312.5,2962.5 4025,2962.5 3943.75,3043.75 2932.5,3043.75 2912.5,3023.75 2912.5,2957.5 2892.5,2937.5 2318.75,2937.5 1937.5,2556.25 1937.5,1462.5 1925,1450 1393.75,1450 1343.75,1400 843.75,1400 712.5,1268.75 712.5,1200 656.25,1143.75 118.75,1143.75 31.25,1231.25 ; 1875,187.5 1875,406.25 1893.75,425 1894,425 1937,468 1937,631 2025,719 2025,875 1881.25,1018.75 1881.25,1105 1901.25,1125 2043.75,1125 2056.25,1112.5 2158.69,1112.69 2179.37,1092 2179.37,945.37 2210.74,914 2210.74,636.26 2186,611.52 2026.48,611.52 2016.97,602 2016.97,526.97 2031,512.94 2186.94,512.94 2209.88,490 2209.88,379.12 2193.75,363 2193.75,162.5 2182.75,151.5 1911,151.5 1875,187.5 ; 1968.75,1456.25 1968.75,2543.75 2293.75,2868.75 2587.5,2868.75 2618.75,2837.5 2618.75,2831.25 2637.5,2812.5 2643.75,2812.5 2662.5,2793.75 2662.5,2587.5 2666,2584 2806,2584 2829,2561 2829,2379 2756.25,2306.25 2756.25,2218.75 2951,2024 2951,1751 2850,1650 2425,1650 2375,1600 2375,1287.5 2362.5,1275 2150,1275 1968.75,1456.25 ; 2402,409 2402,507 2411,516 2571,516 2584,529 2584,605 2578.5,610.5 2424.5,610.5 2407,628 2407,926 2474.75,993.75 3587.5,993.75 3850,731.25 4887.5,731.25 4918.75,762.5 5093.75,762.5 5175,681.25 5175,481.25 5231.25,425 5505,425 5548,382 5548,268 5511.25,231.25 5123.25,231.25 5041.99,149.99 3295.74,150.74 3277,169.47 3223.53,169.47 3031,362 2449,362 2402,409 ; 2537.5,1250 2562.5,1225 3393.75,1225 3825,1656.25 3825,2581.25 3787.5,2618.75 3450,2618.75 3431.25,2600 3431.25,2363.75 3451.25,2343.75 3456.25,2343.75 3506.25,2293.75 3506.25,1768.75 3337.5,1600 3337.5,1568.75 3275,1506.25 2837.5,1506.25 2768.75,1575 2557.5,1575 2537.5,1555 2537.5,1250 ; 2868.75,4150 3090.75,3928 5109.25,3928 5262.5,4081.25 5262.5,4468.75 5351.75,4558 5747,4558 5831.25,4473.75 5831.25,4112.5 6058.75,3885 6215,3885 6231.25,3901.25 6231.25,5317.5 6211.25,5337.5 6068.75,5337.5 6050,5356.25 6050,5462.5 5956.25,5556.25 5893.75,5556.25 5793.75,5656.25 5793.75,8200 5743.75,8250 4431.25,8250 4175,7993.75 4093.75,7993.75 4081.25,7981.25 4081.25,7918.75 2868.75,6706.25 2868.75,4150

## Silkscreen, mask and mechanical layers (free items; w line width, h text height)
Silkscreen Top:
  region: 5550,7077 5550,7061 5468.75,7061 5468.75,7077 5550,7077
  lines w1: -200,0 -200,9300 ; -100,0 -100,9300
  lines w5: 4206.25,4325 5131.25,4325 ; 4206.25,4381.25 5131.25,4381.25 ; 4306.25,4212.5 4306.25,4437.5 4306.25,4493.75 ; 4393.75,4437.5 4406.25,4437.5 ; 4406.25,3981.25 4406.25,4168.75 ; 4406.25,4212.5 4406.25,4437.5 ; 4412.5,4493.75 4206.25,4493.75 4206.25,4437.5 ; 5556.25,7087.5 5681.25,7087.5 5681.25,7050 5431.25,7050 5431.25,7087.5 5575,7087.5 ; 4206.25,4043.75 4206.25,3981.25 5131.25,3981.25 5131.25,4043.75 ; 4206.25,4043.75 5131.25,4043.75 ; 4206.25,4043.75 4206.25,4106.25 ; 4206.25,4106.25 4206.25,4168.75 5131.25,4168.75 5131.25,4106.25 ; 4206.25,4106.25 5131.25,4106.25 ; 4206.25,4268.75 5131.25,4268.75 ; 4206.25,4268.75 4206.25,4437.5 ; 4206.25,4268.75 4206.25,4212.5 5131.25,4212.5 5131.25,4268.75 ; 4206.25,4437.5 5131.25,4437.5 ; 4406.25,4437.5 4406.25,4493.75 5131.25,4493.75 5131.25,4437.5 ; 5131.25,4043.75 5131.25,4106.25 ; 5131.25,4268.75 5131.25,4437.5 ; 5550,7062.5 5631.25,7062.5 5631.25,7075 5550,7075 5550,7062.5
  lines w10: 5650,6125 5768.75,6243.75 ; 5712.5,6243.75 5768.75,6243.75 ; 5768.75,6187.5 5768.75,6243.75
  text "TERM_485" at 5356,8924 h42.5
  text "ATLAS_XP2" at 900,8837.5 h110
  text "v1.2" at 1981.25,8831.25 h42.5
  text "RST_DOF_DSBL" at 3987.5,8112.5 h25.5
  text "1" at 5393.75,7054.91 h25.5
  text "0" at 5700,7054.91 h25.5
  text "A5" at 5200,6987.34 h42.5
  text "A4" at 5200,6874.84 h42.5
  text "A3" at 5200,6781.09 h42.5
  text "A2" at 5200,6681.09 h42.5
  text "A1" at 5200,6593.59 h42.5
  text "A0" at 5200,6487.34 h42.5
  text "XP_PRESENT_OUT" at 5043.75,6162.5 h42.5
  text "BBRAM" at 4481.25,4448.44 h25
  text "BASE ADDRESS" at 4681.25,4448.44 h25
  text "OFF" at 4212.5,4392.19 h25
  text "OFF" at 4312.5,4392.19 h25
  text "0x140" at 4662.5,4392.41 h25.5
  text "0x148" at 4662.5,4336.16 h25.5
  text "OFF" at 4212.5,4335.94 h25
  text "ON" at 4325,4335.94 h25
  text "ON" at 4225,4279.69 h25
  text "OFF" at 4312.5,4279.69 h25
  text "0x160" at 4662.5,4279.91 h25.5
  text "ON" at 4225,4223.44 h25
  text "ON" at 4325,4223.44 h25
  text "0x168" at 4662.5,4223.66 h25.5
  text "RST_DOF" at 4643.75,4123.66 h25.5
  text "J18" at 4262.5,4117.41 h25.5
  text "RST_DOF_DISABLE" at 4537.5,4061.16 h25.5
  text "ON" at 4275,4060.94 h25
  text "RST_DOF_ENABLE" at 4556.25,3998.66 h25.5
  text "OFF" at 4268.75,3992.19 h25
  text "RESET_CPU" at 2031.25,2743.75 h34
  text "PTA_ADDR" at 643,1720 h37.5 r90
Silkscreen Bottom:
  region: 3193.75,8750 3193.75,8987.5 2200,8987.5 2200,8750 3193.75,8750
  lines w10: 1185.25,4073.75 2185.25,4073.75 ; 1185.25,4223.75 2185.25,4223.75 ; 1185.25,4373.75 2185.25,4373.75 ; 1185.25,4523.75 2185.25,4523.75 ; 1185.25,4673.75 2185.25,4673.75 ; 1185.25,4823.75 2185.25,4823.75 ; 1185.25,4973.75 2185.25,4973.75 ; 1185.25,5123.75 2185.25,5123.75 ; 1185.25,5273.75 2185.25,5273.75 ; 1935.25,3923.75 1935.25,5423.75 ; 1185.25,3923.75 2185.25,3923.75 2185.25,5423.75 1185.25,5423.75 1185.25,3923.75
  text "Module Ser.No." at 3028.75,9024.84 h42.5
  text "M.S." at 3387.5,8850 h42.5
  text "v1.2" at 787,8834 h42.5
  text "ATLAS_XP2" at 1875,8832 h110
  text "v1.2" at 787.5,8831.25 h42.5
  text "ATLAS_XP2" at 1875,8831.25 h110
  text "IMP Automatika d.o.o." at 3846,7995 h132.5
  text "www.pupin.rs" at 3082,7682 h132.5
  text "RS232/485" at 1920.75,5451.5 h50
  text "SIGNAL" at 1681,5318 h50
  text "PIN" at 2108.75,5316.5 h50
  text "TX485+" at 1698.75,5169.5 h50
  text "1" at 2085.25,5155 h50
  text "2" at 2085.25,5017.5 h50
  text "RX" at 1622.75,5011.25 h50
  text "TX" at 1622.75,4867.5 h50
  text "3" at 2085.25,4867.5 h50
  text "RX485+" at 1689.75,4718.5 h50
  text "4" at 2085.25,4717.5 h50
  text "GND" at 1641.5,4567.5 h50
  text "5" at 2085.25,4567.5 h50
  text "TX485-" at 1710.25,4423.75 h50
  text "6" at 2085.25,4417.5 h50
  text "RTS" at 1622.75,4273.75 h50
  text "7" at 2085.25,4267.5 h50
  text "8" at 2085.25,4117.5 h50
  text "CTS" at 1630.75,4110.5 h50
  text "9" at 2085.25,3973.75 h50
  text "RX485-" at 1701.75,3965.5 h50
Solder Mask Top:
  region: -1,340 280,340 280,97 -1,97 -1,340
  region: 0,9090 281,9090 281,8847 0,8847 0,9090
Solder Mask Bottom:
  region: -1,340 280,340 280,97 -1,97 -1,340
  region: 1,9090 282,9090 282,8847 1,8847 1,9090
Assembly Drawing Top:
  lines w2: 1128,8084 3042,8084 ; 1234,7146 3559,7146 ; 1519,7436 2637,7436 ; 1519,7444 2637,7444 ; 1523,7643 2637,7643 ; 1523,7651 2637,7651 ; 1526,7854 2637,7854 ; 1526,7862 2637,7862 ; 1530,8024 2637,8024 ; 1530,8032 2637,8032 ; 1628,7023 1628,7266 ; 2314,7628 2314,7631 ; 2594,7023 2594,7266 ; 1128,7391 1128,8190 3042,8190 3042,7391 1128,7391 ; 1235,7023 1235,7266 3558,7266 3558,7023 1235,7023
  text "1. 10.9 mils tracks 50 Ohms impedance (single ended)" at 1246,8521 h50
  text "2. Board Material IT-180A (Tg>170)" at 1241,8403 h50
  text "3. Layer StackUp:" at 1244,8282 h50
  text "Layer" at 1291,8115 h35
  text "Info" at 1997,8113 h35
  text "Thickness" at 2687,8111 h35
  text "0.5+Plating" at 2689,8004 h35
  text "TOP" at 1297,7995 h35
  text "7.24 mil" at 2741,7917 h35
  text "PP" at 1661,7914 h35
  text "IT-180A" at 1875,7910 h35
  text "1080H+3313" at 2241,7910 h35
  text "GND_PLANE" at 1188,7839 h35
  text "0.5 Oz" at 2741,7834 h35
  text "41.889 mil" at 2717,7731 h35
  text "IT-180A" at 1886,7726 h35
  text "Core" at 1613,7723 h35
  text "1.1" at 2335,7719 h35
  text "PWR_PLANE" at 1175,7628 h35
  text "0.5 Oz" at 2727,7622 h35
  text "IT-180A" at 1888,7522 h35
  text "1080H+3313" at 2259,7517 h35
  text "7.155 mil" at 2728,7506 h35
  text "PP" at 1672,7499 h35
  text "BOT" at 1289,7423 h35
  text "0.5+Plating" at 2666,7421 h35
  text "Finished:" at 1310,7199 h35
  text "62.992 (+6.299/-6.299) mil" at 1701,7199 h35
  text "1.6 (+0.16/-0.16) mm" at 2686,7196 h35
  text "Designed:" at 1310,7061 h35
  text "1.498 mm" at 2952,7061 h35
  text "58.976 mil" at 1896,7049 h35
  text "Material used must be RoHS" at 1333,6912 h50
  text "4. Finish: HAL Lead free" at 1302,6742 h50
  text "5. Solder mask: Green" at 1307,6575 h50
  text "6. Silkscreen: White, non-conductive ink. No silkscreen on" at 1304,6422 h50
  text "any solderable component pad" at 1302,6295 h50
Drill Drawing:
  lines w10: -280.57,-3477.4 3454.43,-3477.4 ; -280.57,-3472.4 -280.57,-472.4 ; -280.57,-467.4 3454.43,-467.4 ; -275.57,-3272.4 3449.43,-3272.4 ; -275.57,-3122.4 3449.43,-3122.4 ; -275.57,-2972.4 3449.43,-2972.4 ; -275.57,-2822.4 3449.43,-2822.4 ; -275.57,-2672.4 3449.43,-2672.4 ; -275.57,-2522.4 3449.43,-2522.4 ; -275.57,-2372.4 3449.43,-2372.4 ; -275.57,-2222.4 3449.43,-2222.4 ; -275.57,-2072.4 3449.43,-2072.4 ; -275.57,-1922.4 3449.43,-1922.4 ; -275.57,-1772.4 3449.43,-1772.4 ; -275.57,-1622.4 3449.43,-1622.4 ; -275.57,-1472.4 3449.43,-1472.4 ; -275.57,-1322.4 3449.43,-1322.4 ; -275.57,-1172.4 3449.43,-1172.4 ; -275.57,-1022.4 3449.43,-1022.4 ; -275.57,-872.4 3449.43,-872.4 ; -275.57,-867.4 3449.43,-867.4 ; -275.57,-672.4 3449.43,-672.4 ; -275.57,-667.4 3449.43,-667.4 ; -143.07,-2897.4 -43.07,-2897.4 ; -143.07,-2797.4 -43.07,-2697.4 ; -143.07,-2697.4 -43.07,-2797.4 ; -143.07,-947.4 -43.07,-947.4 ; -118.07,-1697.4 -68.07,-1697.4 ; -118.07,-1397.4 -68.07,-1397.4 ; -118.07,-1272.4 -68.07,-1222.4 ; -118.07,-1222.4 -68.07,-1272.4 ; -108.07,-2602.4 -98.07,-2612.4 -88.07,-2612.4 -78.07,-2602.4 ; -103.07,-3047.4 -83.07,-3047.4 ; -93.07,-3057.4 -93.07,-3037.4 ; -93.07,-2947.4 -93.07,-2847.4 ; -93.07,-1722.4 -93.07,-1672.4 ; -93.07,-1422.4 -93.07,-1372.4 ; -93.07,-997.4 -93.07,-897.4 ; 89.43,-3272.4 89.43,-672.4 ; 94.43,-3272.4 94.43,-672.4 ; 933.6,-3272.4 933.6,-672.4 ; 1740.27,-3472.4 1740.27,-672.4 ; 2295.27,-3472.4 2295.27,-672.4 ; 3454.43,-3472.4 3454.43,-472.4 ; -143.07,-3247.4 -43.07,-3247.4 ; -143.07,-3247.4 -43.07,-3147.4 ; -143.07,-3247.4 -143.07,-3147.4 ; -143.07,-3147.4 -43.07,-3247.4 ; -143.07,-3147.4 -43.07,-3147.4 ; -118.07,-1572.4 -68.07,-1572.4 ; -118.07,-1572.4 -118.07,-1522.4 ; -118.07,-1572.4 -68.07,-1522.4 ; -118.07,-1522.4 -68.07,-1522.4 ; -118.07,-1522.4 -68.07,-1572.4 ; -68.07,-1572.4 -68.07,-1522.4 ; -43.07,-3247.4 -43.07,-3147.4 ; -275.57,-3472.4 3449.43,-3472.4 3449.43,-472.4 -275.57,-472.4 -275.57,-3472.4 ; -143.07,-3047.4 -93.07,-2997.4 -43.07,-3047.4 -93.07,-3097.4 -143.07,-3047.4 ; -143.07,-1097.4 -43.07,-1097.4 -43.07,-1147.4 -93.07,-1147.4 -93.07,-1047.4 -143.07,-1047.4 -143.07,-1097.4 ; -143.07,-997.4 -143.07,-897.4 -43.07,-897.4 -43.07,-997.4 -143.07,-997.4 ; -118.07,-2607.4 -103.07,-2622.4 -83.07,-2622.4 -68.07,-2607.4 -68.07,-2587.4 -83.07,-2572.4 -103.07,-2572.4 -118.07,-2587.4 -118.07,-2607.4 ; -118.07,-2457.4 -118.07,-2437.4 -93.07,-2462.4 -68.07,-2437.4 -68.07,-2457.4 -93.07,-2432.4 -118.07,-2457.4 ; -118.07,-2297.4 -93.07,-2322.4 -68.07,-2297.4 -93.07,-2272.4 -118.07,-2297.4 ; -118.07,-2157.4 -93.07,-2132.4 -68.07,-2157.4 -118.07,-2157.4 ; -118.07,-2007.4 -103.07,-2022.4 -83.07,-2022.4 -68.07,-2007.4 -68.07,-1987.4 -83.07,-1972.4 -103.07,-1972.4 -118.07,-1987.4 -118.07,-2007.4 ; -118.07,-1847.4 -68.07,-1847.4 -68.07,-1872.4 -93.07,-1872.4 -93.07,-1822.4 -118.07,-1822.4 -118.07,-1847.4 ; -118.07,-1722.4 -68.07,-1722.4 -68.07,-1672.4 -118.07,-1672.4 -118.07,-1722.4 ; -103.07,-2587.4 -103.07,-2582.4 -98.07,-2582.4 -98.07,-2587.4 -103.07,-2587.4 ; -88.07,-2587.4 -88.07,-2582.4 -83.07,-2582.4 -83.07,-2587.4 -88.07,-2587.4
  text "DRILL CHART" at 1072.35,-612.4 h80
  text "SYM" at -225.57,-812.4 h80
  text "DIAM" at 339.85,-812.4 h80
  text "TOL" at 1208.6,-812.4 h80
  text "QTY" at 1885.27,-812.4 h80
  text "NOTE" at 2692.35,-812.4 h80
  text "0.020" at 525.83,-973.34 h55
  text "259" at 2005.27,-973.34 h55
  text "0.028" at 525.83,-1123.34 h55
  text "36" at 2075.27,-1123.34 h55
  text "0.031" at 536.94,-1273.34 h55
  text "4" at 2145.27,-1273.34 h55
  text "0.034" at 525.83,-1423.34 h55
  text "256" at 2005.27,-1423.34 h55
  text "0.038" at 525.83,-1573.34 h55
  text "150" at 2016.38,-1573.34 h55
  text "0.040" at 525.83,-1723.34 h55
  text "2" at 2145.27,-1723.34 h55
  text "0.052" at 525.83,-1873.34 h55
  text "8" at 2145.27,-1873.34 h55
  text "0.055" at 525.83,-2023.34 h55
  text "3" at 2145.27,-2023.34 h55
  text "0.060" at 525.83,-2173.34 h55
  text "2" at 2145.27,-2173.34 h55
  text "0.080" at 525.83,-2323.34 h55
  text "4" at 2145.27,-2323.34 h55
  text "0.100" at 536.94,-2473.34 h55
  text "11" at 2097.5,-2473.34 h55
  text "0.116" at 548.06,-2623.34 h55
  text "4" at 2145.27,-2623.34 h55
  text "0.120" at 536.94,-2773.34 h55
  text "3" at 2145.27,-2773.34 h55
  text "0.128" at 536.94,-2923.34 h55
  text "2" at 2145.27,-2923.34 h55
  text "0.160" at 536.94,-3073.34 h55
  text "3" at 2145.27,-3073.34 h55
  text "0.190" at 536.94,-3223.34 h55
  text "1" at 2156.38,-3223.34 h55
  text "TOTAL" at 509.02,-3412.4 h80
  text "748" at 1930.27,-3412.4 h80